# Altium PCB UC-523.PcbDoc (part 2 of 2)
Units mil, origin at the board's own origin, x right, y up, seen from the top; angles counter-clockwise.
Board outline 3149.61 x 3149.61 mil, 2 copper layers (Top Layer, Bottom Layer); 795 components, 348 nets, 3091 pads, 29 vias.
Unrouted connection lines stored in the file: 1727.
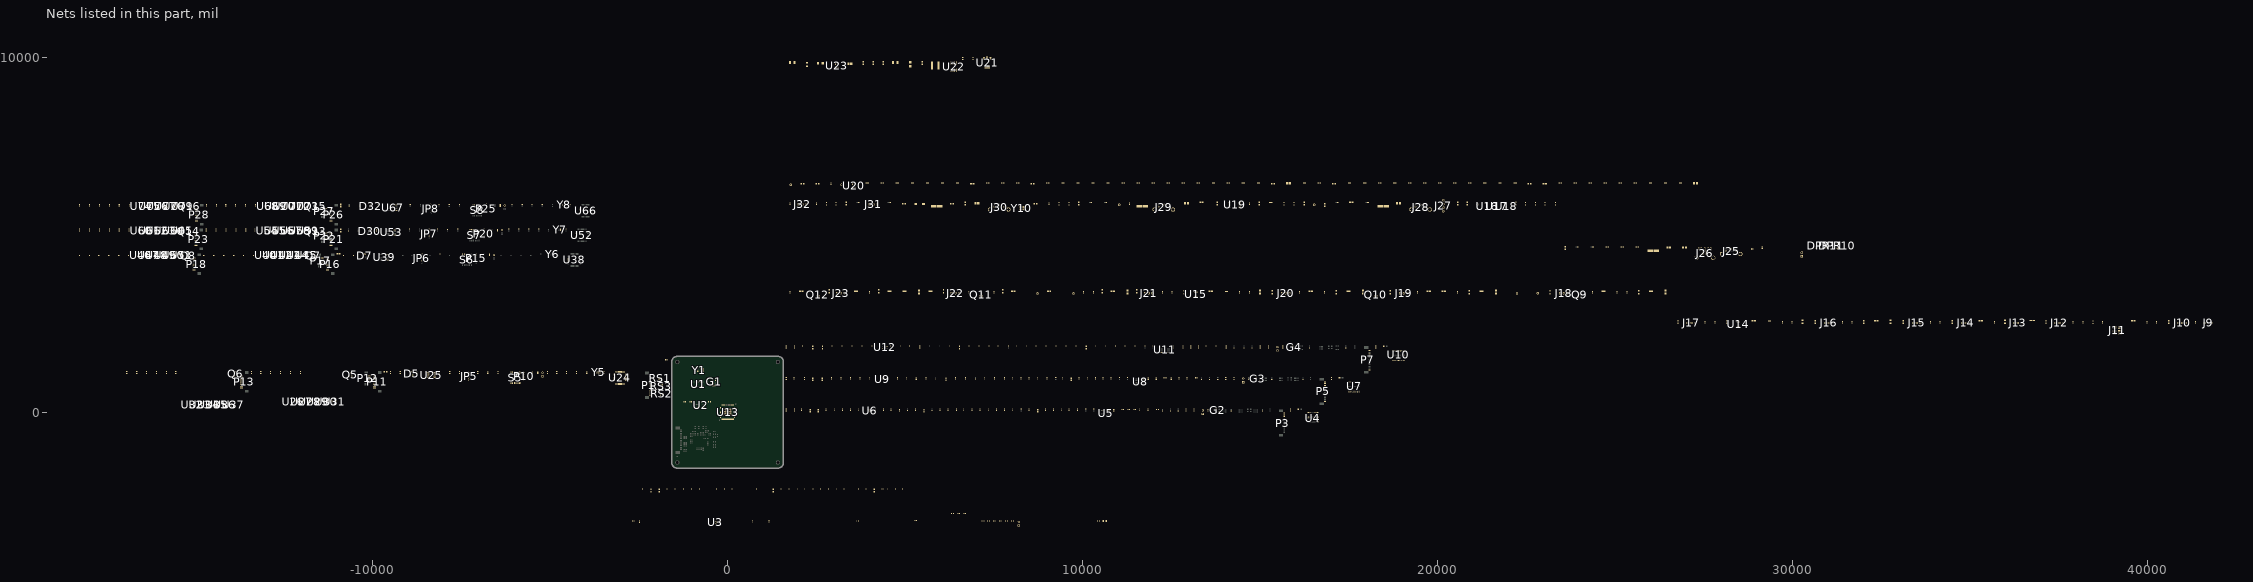
[diagram p2: the nets of this part, all layers, seen from the top]

## Footprints (in the part's own frame and the unit in brackets; to place one, negate y for a bottom-side part, rotate by r counter-clockwise, add the part's x,y. Pads: shape width x height; smd on the part's side, far side on the other; paste and mask are expansions set on the pad) (continued)
OSCCC250X320X70-4M [mm]
  rect 1.5x1.6 smd mask+0: 1(-0.95,1.25) 2(-0.95,-1.25) 3(0.95,-1.25) 4(0.95,1.25)
  Top Layer region: 0.175,1.65 0.175,0.375 1.3,0.375 1.3,-0.375 0.125,-0.375 0.125,-1.65 -0.175,-1.65 -0.175,-0.375 -1.3,-0.375 -1.3,0.375 -0.175,0.375 -0.175,1.65
  silkscreen extent -1.92,-1.65 1.92,1.65, body extent -1.32,-1.67 1.32,1.67, height 0.7
QFN40P1000X1000X100-89M [mm] "QFN, 88-Leads, Body 10.1x10.1mm (max), Pitch 0.40mm, IPC Low Density"
  oval 0.8x0.2 smd mask+0: 1(-5.05,4.2) 2(-5.05,3.8) 3(-5.05,3.4) 4(-5.05,3) 5(-5.05,2.6) 6(-5.05,2.2) 7(-5.05,1.8) 8(-5.05,1.4) 9(-5.05,1) 10(-5.05,0.6) 11(-5.05,0.2) 12(-5.05,-0.2) 13(-5.05,-0.6) 14(-5.05,-1) 15(-5.05,-1.4) 16(-5.05,-1.8) 17(-5.05,-2.2) 18(-5.05,-2.6) 19(-5.05,-3) 20(-5.05,-3.4) 21(-5.05,-3.8) 22(-5.05,-4.2) 45(5.05,-4.2) 46(5.05,-3.8) 47(5.05,-3.4) 48(5.05,-3) 49(5.05,-2.6) 50(5.05,-2.2) 51(5.05,-1.8) 52(5.05,-1.4) 53(5.05,-1) 54(5.05,-0.6) 55(5.05,-0.2) 56(5.05,0.2) 57(5.05,0.6) 58(5.05,1) 59(5.05,1.4) 60(5.05,1.8) 61(5.05,2.2) 62(5.05,2.6) 63(5.05,3) 64(5.05,3.4) 65(5.05,3.8) 66(5.05,4.2)
  oval 0.2x0.8 smd mask+0: 23(-4.2,-5.05) 24(-3.8,-5.05) 25(-3.4,-5.05) 26(-3,-5.05) 27(-2.6,-5.05) 28(-2.2,-5.05) 29(-1.8,-5.05) 30(-1.4,-5.05) 31(-1,-5.05) 32(-0.6,-5.05) 33(-0.2,-5.05) 34(0.2,-5.05) 35(0.6,-5.05) 36(1,-5.05) 37(1.4,-5.05) 38(1.8,-5.05) 39(2.2,-5.05) 40(2.6,-5.05) 41(3,-5.05) 42(3.4,-5.05) 43(3.8,-5.05) 44(4.2,-5.05) 67(4.2,5.05) 68(3.8,5.05) 69(3.4,5.05) 70(3,5.05) 71(2.6,5.05) 72(2.2,5.05) 73(1.8,5.05) 74(1.4,5.05) 75(1,5.05) 76(0.6,5.05) 77(0.2,5.05) 78(-0.2,5.05) 79(-0.6,5.05) 80(-1,5.05) 81(-1.4,5.05) 82(-1.8,5.05) 83(-2.2,5.05) 84(-2.6,5.05) 85(-3,5.05) 86(-3.4,5.05) 87(-3.8,5.05) 88(-4.2,5.05)
  rect 5.5x5.5 smd mask+0: 89(0,0)
  round 1 smd mask+0.5: ""(-5.81,-5.81) ""(5.81,5.81)
  silkscreen extent -6.45,-5.1 5.1,5.1, body extent -5.05,-5.05 5.05,5.05, height 1
R0603 [mm]
  rect 0.7x0.9 smd: 1(0.65,0) 2(-0.65,0)
  silkscreen extent -1.12,-0.64 1.12,0.64
RC0603_3P [mm]
  rect 1.1x1 smd mask+0.079: 1(-1.7,0) 2(0,0) 3(1.7,0)
  silkscreen extent -3.37,-1 2.5,1, body extent -2.5,-1 2.5,1, height 0
RESC1005X40M [mm]
  rect 0.68x0.72 smd mask+0: 1(-0.52,0) 2(0.52,0)
  silkscreen extent -0.53,-0.59 0.53,0.59, body extent -0.55,-0.3 0.55,0.3, height 0.4
RESC1608X50M [mm] "Chip Resistor, 2-Leads, Body 1.5x0.8mm, IPC Low Density"
  rect 1.4x1.05 smd mask+0: 1(-0.8,0) 2(0.8,0)
  silkscreen extent -0.85,-0.75 0.85,0.75, body extent -0.85,-0.45 0.85,0.45, height 0.5
RESC1608X55M [mm]
  rect 1.1x1.1 smd mask+0: 1(-0.9,0) 2(0.9,0)
  Top Layer keep-out region: -0.3,-0.475 0.3,-0.475 0.3,0.475 -0.3,0.475
  silkscreen extent -0.87,-0.77 0.87,0.77, body extent -0.87,-0.47 0.87,0.47, height 0.55
RESC1608X55M_A [mm]
  rect 1.2x1.1 smd mask+0: 1(-0.9,0) 2(0.9,0)
  Top Layer keep-out region: -0.25,-0.475 0.25,-0.475 0.25,0.475 -0.25,0.475
  silkscreen extent -0.85,-0.77 0.85,0.77, body extent -0.85,-0.48 0.85,0.47, height 0.55
RESC2012X65M [mm]
  rect 1.3x1.45 smd mask+0: 1(-1.05,0) 2(1.05,0)
  Top Layer keep-out region: -0.375,-0.675 0.375,-0.675 0.375,0.675 -0.375,0.675
  silkscreen extent -1.05,-0.95 1.05,0.95, body extent -1.05,-0.67 1.05,0.67, height 0.65
RESONATOR-SMD [mm]
  rect 0.7x1.7 smd: 1(-1.2,0) 2(0,0) 3(1.2,0)
  silkscreen extent -1.8,-0.65 1.8,0.65
SAMTEC_FTSH-105-01-L-DV-K [mm]
  rect 0.74x2.79 smd mask+0: 1(0,0) 2(0,4.07) 3(1.27,0) 4(1.27,4.07) 5(2.54,0) 6(2.54,4.07) 7(3.81,0) 8(3.81,4.07) 9(5.08,0) 10(5.08,4.07)
  silkscreen extent -0.67,-1.83 5.75,3.75, body extent -0.67,0.32 5.75,3.75, height 5.71
SAMTEC_TSW-102-08-G-S [mm]
  rect 1.72x1.72 / inner round 1.72 / far side rect 1.72x1.72 hole 1.02 mask+0: 1(0,0)
  round 1.72 hole 1.02 mask+0: 2(2.54,0)
  silkscreen extent -1.27,-1.27 3.81,1.27, body extent -1.3,-1.3 3.84,1.3, height 8.38
SAMTEC_TSW-104-08-G-S [mil]
  rect 67.72x67.72 hole 40.16 mask+0: 1(150,0)
  round 67.72 hole 40.16 mask+0: 2(50,0) 3(-50,0) 4(-150,0)
  silkscreen extent -200,-50 233,50, body extent -201,-51 201,51, height 330
SH_1.25MM*8 [mm]
  rect 0.7x2 smd: 1(-4.375,3.75) 2(-3.125,3.75) 3(-1.875,3.75) 4(-0.625,3.75) 5(0.625,3.75) 6(1.875,3.75) 7(3.125,3.75) 8(4.375,3.75)
  rect 1.9x2.4 smd: 9(-6.731,0) 9(6.731,0)
  silkscreen extent -7.87,-1.27 7.87,3.81
SMT_1.25MM*4 [mm]
  rect 0.7x2.3 smd: 1(1.875,-1.025) 2(0.625,-1.025) 3(-0.625,-1.025) 4(-1.875,-1.025)
  rect 1.9x2.4 smd: 7(-4.1,1) 7(4.1,1)
  silkscreen extent -5.28,-2.16 5.25,2.42
SOD2513X120M [mm] "SOIC, 2-Leads, Body 1.4x1.8mm (max), Pitch 1.27mm, IPC Low Density"
  rect 1.65x0.55 smd mask+0: 1(-1.1,0) 2(1.1,0)
  silkscreen extent -0.9,-0.7 0.9,0.7, body extent -0.9,-0.7 0.9,0.7, height 1.2
SOIC127P600X175-8M [mm] "SOIC, 8-Leads, Body 5.0x4.0mm (max), Pitch 1.27mm, IPC Low Density"
  rect 2.5x0.7 smd mask+0: 1(-2.45,1.905) 2(-2.45,0.635) 3(-2.45,-0.635) 4(-2.45,-1.905) 5(2.45,-1.905) 6(2.45,-0.635) 7(2.45,0.635) 8(2.45,1.905)
  silkscreen extent -4.64,-2.5 2,2.53, body extent -2,-2.5 2,2.5, height 1.75
SOIC127P600X175-8N [mm] "SOIC, 8-Leads, Body 4.9x3.9mm (max), Pitch 1.27mm, IPC Medium Density"
  rect 2.1x0.6 smd: 1(-2.425,1.905) 2(-2.425,0.635) 3(-2.425,-0.635) 4(-2.425,-1.905) 5(2.425,-1.905) 6(2.425,-0.635) 7(2.425,0.635) 8(2.425,1.905)
  silkscreen extent -3.5,-2.45 0.98,3.25, body extent -1.95,-2.45 1.95,2.45, height 1.75
SOIC127P790X203-8M [mm] "SOIC, 8-Leads, Body 5.3x5.3mm (max), Pitch 1.27mm, IPC Low Density"
  oval 1.8x0.7 smd mask+0: 1(-3.675,1.905) 2(-3.675,0.635) 3(-3.675,-0.635) 4(-3.675,-1.905) 5(3.675,-1.905) 6(3.675,-0.635) 7(3.675,0.635) 8(3.675,1.905)
  silkscreen extent -5.58,-2.65 2.38,2.63, body extent -2.62,-2.63 2.63,2.63, height 2.03
SOIC-8 [mm]
  oval 2.2x0.6 smd: 1(-2.4,1.905) 2(-2.4,0.635) 3(-2.4,-0.635) 4(-2.4,-1.905) 5(2.4,-1.905) 6(2.4,-0.635) 7(2.4,0.635) 8(2.4,1.905)
  silkscreen extent -2.52,-2.5 0.9,2.88, body extent -2,-2.5 2,2.5, height 1.75
SON50P300X300X100-11M [mm]
  oval 0.9x0.3 smd mask+0: 1(-1.55,1) 2(-1.55,0.5) 3(-1.55,0) 4(-1.55,-0.5) 5(-1.55,-1) 6(1.55,-1) 7(1.55,-0.5) 8(1.55,0) 9(1.55,0.5) 10(1.55,1) 11(0,0)
  round 0.6 hole 0.3 mask+0: 12(0,0) 13(-0.5,0.75) 14(0.5,0.75) 15(-0.5,-0.75) 16(0.5,-0.75)
  Top Layer region: 0.825,-1.2 0.825,1.2 0.39,1.2 0.39,1.9 0.11,1.9 0.11,1.2 -0.11,1.2 -0.11,1.9 -0.39,1.9 -0.39,1.2 -0.825,1.2 -0.825,-1.2 -0.39,-1.2 -0.39,-1.9 -0.11,-1.9 -0.11,-1.2 0.11,-1.2 0.11,-1.9 0.39,-1.9 0.39,-1.2 0.825,-1.2
  silkscreen extent -2.49,-1.55 1.55,1.55, body extent -1.55,-1.55 1.55,1.55, height 1
SOP95P275X110-5M [mm] "SOT23, 5-Leads, Body 3.0x3.0mm (max), Pitch 0.95mm, IPC Low Density"
  rect 1.3x0.7 smd mask+0: 1(-1.15,0.95) 2(-1.15,0) 3(-1.15,-0.95) 4(1.15,-0.95) 5(1.15,0.95)
  silkscreen extent -2.77,-1.53 0.75,1.53, body extent -0.75,-1.5 0.75,1.5, height 1.1
SOT23-3 [mil]
  rect 40x50 smd: 1(40,-50) 2(-40,-50) 3(0,50)
  silkscreen extent -50,-10 50,50, body extent -59,-52 59,46, height 42
SOT26 [mm]
  rect 1.2x0.55 smd: 1(-1.25,0.95) 2(-1.25,0) 3(-1.25,-0.95) 4(1.25,-0.95) 5(1.25,0) 6(1.25,0.95)
  silkscreen extent -2.17,-1.4 0.45,1.62
SOT92P240X110-3M [mm] "SOT23, 3-Leads, Body 3.0x2.5mm (max), Pitch 0.92mm, IPC Low Density"
  rect 1.75x0.6 smd mask+0: 1(-0.975,0.915) 2(-0.975,-0.915) 3(0.975,0)
  silkscreen extent -2.97,-1.5 0.7,1.5, body extent -0.7,-1.5 0.7,1.5, height 1.1
SOT95P280X145-5M [mm] "SOT23, 5-Leads, Body 3.1x2.8mm (max), Pitch 0.95mm, IPC Low Density"
  rect 1.2x0.7 smd mask+0: 1(-1.2,0.95) 2(-1.2,0) 3(-1.2,-0.95) 4(1.2,-0.95) 5(1.2,0.95)
  silkscreen extent -2.74,-1.55 0.87,1.55, body extent -0.87,-1.55 0.87,1.55, height 1.45
"SOT-23 (Standard)" [mil]
  rect 40x50 smd: D(40,100) G(0,0) S(80,0)
  silkscreen extent -10,40 90,100, body extent -19,-2 99,96, height 42
SOT-223 [mm] "TSOP, 44-Leads, Body 18.4x10.2mm (max), Pitch 0.80mm, IPC Mediu"
  rect 1.5x2 smd: 1(2.3,6.275) 2(0,6.3) 3(-2.3,6.275)
  rect 4x2 smd: 2(0,0)
  silkscreen extent -3.32,1.48 3.32,4.75, body extent -3.2,-0.36 3.3,6.54, height 1.72
SOTFL35P100X50-3M [mm]
  rect 0.58x0.2 smd mask+0: 1(-0.57,0.35) 2(-0.57,-0.35) 3(0.57,0)
  silkscreen extent -1.7,-0.65 0.43,0.7, body extent -0.45,-0.55 0.45,0.55, height 0.5
SW_EVQ-5PN04K [mm]
  rect 2x1.6 smd mask+0: 1(-2.7,0) 2(2.7,0)
  Top Layer region: -2.9,2 -2.9,0.9 -1.6,0.9 -1.6,-0.9 -2.9,-0.9 -2.9,-2 2.9,-2 2.9,-0.9 1.6,-0.9 1.6,0.9 2.9,0.9 2.9,2
  silkscreen extent -3,-2 3,2, body extent -3,-2 3,2, height 4.3
TE_3-644456-3 [mil]
  rect 68x68 / inner round 68 / far side rect 68x68 hole 40 mask+0: 1(0,0)
  round 68 hole 40 mask+0: 2(100,0) 3(200,0)
  silkscreen extent -94,-46 244,46, body extent -45,-47 245,47, height 405
TP25C50 [mil]
  round 20 hole 10 mask+0: 1(0,0)
  silkscreen extent -15,-15 15,15
TQFP32-08 [mil]
  rect 50x22 smd: 1(-169,110.24) 2(-169,78.74) 3(-169,47.25) 4(-169,15.75) 5(-169,-15.74) 6(-169,-47.24) 7(-169,-78.74) 8(-169,-110.24) 17(169.01,-110.23) 18(169,-78.73) 19(169,-47.24) 20(169,-15.74) 21(169,15.75) 22(169,47.25) 23(169,78.74) 24(169,110.24)
  rect 22x50 smd: 9(-110.24,-169) 10(-78.74,-169) 11(-47.24,-168.99) 12(-15.74,-169) 13(15.75,-169) 14(47.25,-169) 15(78.74,-169) 16(110.24,-169) 25(110.24,169) 26(78.74,169) 27(47.25,169) 28(15.75,169) 29(-15.75,169) 30(-47.24,169) 31(-78.73,169) 32(-110.23,169)
  silkscreen extent -138,-138 138,138
UDFN [mm] "QFN, 8-Leads, Body 2.1x3.1mm (max), Pitch 0.50mm, IPC Medium Density"
  rect 0.6x0.3 smd: 1(-1.5,0.75) 2(-1.5,0.25) 3(-1.5,-0.25) 4(-1.5,-0.75) 5(1.5,-0.75) 6(1.5,-0.25) 7(1.5,0.25) 8(1.5,0.75)
  rect 1.4x1.6 smd: 4(0,0)
  silkscreen extent -2.52,-1.55 1.55,1.55, body extent -1.5,-1 1.52,1, height 0.6
爱普生晶振3.2×2.5mm [mm]
  rect 1.05x0.85 smd: 1(-1.1,-0.8) 2(1.1,-0.8) 3(1.1,0.8) 4(-1.1,0.8)
  Top Layer pour cut-out: -1.778,1.372 -1.778,-1.372 1.778,-1.372 1.778,1.372
  silkscreen extent -1.78,-2.03 1.78,1.37
爱普生晶振3.2×2.5MM [mm]
  rect 1.05x0.85 smd: 1(-1.1,-0.8) 2(1.1,-0.8) 3(1.1,0.8) 4(-1.1,0.8)
  Top Layer pour cut-out: -1.778,1.372 -1.778,-1.372 1.778,-1.372 1.778,1.372
  silkscreen extent -1.78,-2.03 1.78,1.37
"爱普生晶振3.2×2.5MM - 无源" [mm]
  rect 1.05x0.85 smd: 1(-1.1,-0.8) 2(1.1,0.8) 3(1.1,-0.8) 4(-1.1,0.8)
  Top Layer pour cut-out: -1.778,1.372 -1.778,-1.372 1.778,-1.372 1.778,1.372
  silkscreen extent -1.78,-2.03 1.78,1.37

## Part data
C1 C1_1 C2 C2_1 C41 C42 C81 C82 C121 C122: library part "CAP CER SMT 4.3pF 0805", "CAP CER SMT 4.3pF 0805"
C3 C3_1 C29 C43 C69 C83 C109 C123 C149: library part CAP, "RC=1206"
C4 C44 C84 C124 C249: library part Cap, "50V/8.2u/0805"
C5 C6 C8 C9 C9_1 C10 C10_1 C11 C12 C13 C14 C15 C15_1 C16 C16_1 C17 C17_1 C18 C18_1 C19 C19_1 C20 C20_1 C21 C21_1 C22 C22_1 C23 C23_1 C24 C24_1 C25 C25_1 C26 C26_1 C27 C27_1 C28 C28_1 C29_1 C30 C30_1 C31 C31_1 C32 C32_1 C33 C34 C35 C36 C36_1 C37 C37_1 C38 C38_1 C39 C39_1 C40 C40_1 C41_1 C42_1 C43_1 C44_1 C45 C45_1 C46 C46_1 C47_1 C48 C49 C50 C51 C52 C53 C54 C55 C56 C57 C58 C59 C60 C61 C62 C63 C64 C65 C66 C67 C68 C70 C71 C72 C73 C74 C75 C76 C77 C78 C79 C80 C85 C86 C88 C89 C90 C91 C92 C93 C94 C95 C96 C97 C98 C99 C100 C101 C102 C103 C104 C105 C106 C107 C108 C110 C111 C112 C113 C114 C115 C116 C117 C118 C119 C120 C125 C126 C128 C129 C130 C131 C132 C133 C134 C135 C136 C137 C138 C139 C140 C141 C142 C143 C144 C145 C146 C147 C148 C150 C151 C152 C153 C154 C155 C156 C157 C158 C159 C160 C250: library part CAP0805, "Capacitor"
C7 C47 C87 C127: library part "CAP SMT 0.1uF 16V X7R", "CAP SMT 0.1uF 16V X7R"
C161: library part "0.1 uFd 0402", "CAP .1UF 16V CERAMIC Y5V 0402"
C162 C163 C164 C166 C167 C168 C169 C170 C171 C172 C173 C175 C176 C177 C178 C179 C181 C182 C183 C184 C185 C186 C189 C190 C191 C192 C193 C194 C195 C196 C197 C198 C199 C200 C201 C202 C203 C204 C205 C206 C207 C208 C209 C210 C211 C212 C213 C214 C215 C216 C217 C218 C219 C220 C221 C222 C223 C224 C225 C226 C227 C228 C229 C230 C231 C232 C233 C234 C235 C236 C237 C238 C239 C240 C241 C242 C243 C244 C245 C246 C252 C254 C255: library part "CAPACITOR NON-POL"
C165 C174 C180 C187: library part "CAP POL", "CAP ALUM 150UF 16V 20% SMD"
C188: library part "CAPACITOR NON-POL", "CAP CER 1.5UF 10V 10% X7R 0805"
C247 C248: library part CAP, "CAP - CER, 1uF, 10V, +/-10%, X5R, 0402"
C251: library part "CAP POL", "CAP TANT 22UF 16V 10% 1206"
C253: library part "CAPACITOR NON-POL", "CAP CER 2200PF 50V 10% X7R 0805"
C256 C257 C258 C260 C261 C262 C264 C265 C266 C268 C269 C270: library part "CAP SMT C100nF25V10%X7R", "Capacitor"
C259 C263 C267 C271: library part Cap, "Capacitor"
D6 D8 D31 D33 V1 V2 V3 V4: library part LED0, "Typical INFRARED GaAs LED"
D9 D10 D11 D12 D13 D14 D15 D16 D17 D18 D19 D20 D21 D22 D23 D24 D25 D26 D27 D28 D29 SUSP10: library part LED
DPR10 DPR11: library part DPR12_0, "Resistor, 4.7K, 0402, 1/10W, 5%"
G1 G1_1 G2 G3 G4: library part CTY4-B
J9 J10 J12 J13 J14 J15 J16 J17 J18 J19 J20 J21 J22 J23 J31 J32: library part "3PIN JUM", "CONN HEADER VERT 3POS .100 TIN"
J11: library part "10 Pin Header 50mil Keyed SMD", "CONN HEADER 10 PIN 50MIL KEYED SMD"
J24: library part HEADER_1x2
J25 J28 J30: library part UEA1112C_TX, "9 Position Right Angle 3.0 USB Connector"
J26: library part UEB1112C-2AK1-4H, "USB 3.0 B Series Right Angle,T/H 9 Pos"
J27: library part "HEADER 4", "CONN HEADER 4POS .100\" SNGL GOLD"
J29: "9 Position Right Angle 3.0 USB Connector"
JP5 JP6 JP7 JP8: "Header, 3-Pin, Dual row"
K5 K6 K7 K8: "Switch"
L1 L1_1 L2 L3 L3_1 L4 L4_1 L5 L5_1 L6 L7 L8 L9 L10 L11 L12 L13 L14 L15 L16: library part Inductor, "Inductor"
L17 L18 L19 L20 L21 L22 L23: library part INDUCTOR, "FERRITE CHIP 220 OHM 2A 0805"
L24: library part INDUCTOR, "INDUCTOR 4.7UH 2.7A 20% SMD"
L25: library part INDUCTOR, "INDUCTOR 2.2UH 1.20A 20% 1210"
P1 P3 P3_1 P5 P7: library part "Header 30", "Header, 30-Pin"
P2 P4 P6 P8 P9 P14 P19 P24: "Header, 2-Pin"
P10 P15 P20 P25: library part ARDUINO_SERIAL_PROGRAMPTH
P11 P13 P16 P18 P21 P23 P26 P28: "Header, 8-Pin"
P12 P17 P22 P27: "Header, 4-Pin"
Q5 Q6 Q7 Q8 Q13 Q14 Q15 Q16: library part NMOS
Q9 Q10 Q11 Q12: "MOSFET N-CH 50V 500MA SOT23"
R1 R2 R3 R4 R5 R6 R7 R8 R9 R10 R11 R11_1 R12 R13 R14 R15 R16 R17 R18 R19 R20 R21 R22 R23 R24 R25 R26 R27 R28 R29 R30 R31 R32 R33 R34 R35 R36 R37 R38 R39 R40 R41 R42 R43 R44 R130 R131 R132 R133 R134 R135 R136 R137 R138 R139 R140 R141 R142 R143 R144 R145 R146 R147 R148 R149 R150 R151 R152 R153 R154 R155 R156 R157 R158 R159 R160 R161 R162 R163 R164 R165 R166 R167 R168 R169 R170 R171 R172 R173 R174 R175 R176 R177 R178 R179 R180 R181 R182 R183 R184 R185 R186 R187 R188 R189 R190 R191 R192 R193 R194 R195 R196 R197 R198 R199 R200 R201 R202 R203 R204 R205 R206 R207 R208 R209 R210 R211 R212 R213 R214 R215 R216 R217 R218 R219 R220 R221: library part Res2, "Resistor"
R45 R46 R47 R49 R50 R51 R53 R55 R56 R59 R60 R62 R63 R65 R66 R70 R72 R75 R78 R81 R83 R85 R86 R88 R89 R92 R96 R97 R102 R105 R115 R116 R118 R126: library part R_Dup1, "RES 10.0K OHM 1/10W 1% 0603 SMD"
R48 R52 R54 R57 R58 R61 R64 R67 R68 R71 R73 R74 R76 R77 R79 R80 R82 R84 R87 R90 R91 R94 R95 R98 R99 R100 R101 R103 R104 R106 R107 R117 R120 R121 R123 R124: library part R_Dup1
R69 R93: library part R_Dup1, "RES 28.0K OHM 1/10W 1% 0402 SMD"
R108 R109 R114 R119 R122: library part R, "RES 1M OHM 1/10W 1% 0603 SMD"
R110 R111: library part R_Dup1, "RES 2.00K OHM 1/10W 1% 0603 SMD"
R112: library part R_Dup1, "RES 200 OHM 1% 0603 SMD"
R113: library part R_Dup1, "RES 6.04K OHM .25W 1% 0603 SMD"
R125: library part R, "RES 1.00M OHM 1/10W 1% 0402 SMD"
R127 R129: library part R_Dup1, "RES 7.5K OHM 1/10W 1% 0603 SMD"
R128: library part R_Dup1, "RES 2.4K OHM 1/10W 1% 0603 SMD"
RS1 RS1_1 RS2 RS2_1 RS3 RS3_1 RS4 RS5 RS6 RS7 RS8 RS9 RS10 RS11 RS12: library part RN4
S5 S6 S7 S8: "DIP Switch, 6 Position, SPST"
SW10: library part B3U1000P
TP9 TP11 TP13 TP16 TP17 TP18 TP19 TP20 TP21 TP22: library part TP, "TEST POINT PC MINI .040\"D RED"
TP10 TP12 TP14 TP15: library part TP
TVS9: library part "TVS 5V SOD-323_0", "TVS UNIDIR 350W 5V SOD-323"
U2 U5 U8 U11: library part 24LC64-I/SN, "IC EEPROM 64KBIT 400KHZ 8SOIC"
U3 U6 U9 U12: library part AT24C128
U13: library part CYUSB3314-88LTXC_2
U19: library part 24LC128, "IC EEPROM 128KBIT 400KHZ 8SOIC"
U20: library part NCP361SNT1G_0, "IC USB POS OVP/OC_TSOP5"
U21: library part AMS1117
U22: "IC REG BUCK SYNC ADJ 3A 8SOIC"
U23: "IC REG BUCK SYNC 1.2V SOT23-5"
U24 U38 U52 U66: library part ATMEGA168
U25 U39 U53 U67: library part MAX3485CSA
Y1 Y1_1 Y2 Y3 Y4: library part "XTAL 32.768KHZ", "Crystal, CRYSTAL 32.768KHZ 6PF SMD"
Y5 Y6 Y7 Y8: library part RESONATORSMD
Y10: library part CRYSTAL_1

## Free pads (board coordinates)
  round 118.11 hole 78.74: 0(-1417.32,-1417.32) 0(-1417.32,1417.32) 0(1417.32,-1417.32) 0(1417.32,1417.32)

## Via types
v1: diameter 25.98, hole 12.99, Top Layer to Bottom Layer, 25 vias
v2: diameter 24, hole 12, Top Layer to Bottom Layer, 4 vias

## Nets (pads, with @x,y where several pads share a name; then routed paths per layer and width w, separated by ;. In a path a pad name is that pad's centre, name@x,y a point inside that pad or via, vN(x,y) a via of type N, cw(c..) or ccw(c..) an arc to the next point about the centre after c; other vN are vias at no path point)
A0: U24.23
A1: U24.24
A2: U24.25
A3: U24.26
A4: U24.27
A5: U24.28
A6: U24.19
A7: U24.22
AD1: R131.2 S5.1 U24.2
AD2: R132.2 S5.2 U24.9
AD3: R133.2 S5.3 U24.10
AD4: R134.2 S5.4 U24.11
AREF: C257.2 U24.20
AVDD: C13.2 C14.1 C53.2 C54.1 C93.2 C94.1 C133.2 C134.1 L2.2 L6.2 L10.2 L14.2 U1.A7 U4.A7 U7.A7 U10.A7
CLK_OUT: G1.3 U1.D6
D0_IO: P1.18
D1_IO: P1.17
D2: P11.5 P13.5 S5.8 U24.32
D2_IO: P1.16
D3: P11.6 P13.6 S5.7 U24.1
D3_IO: P1.15
D4_IO: P1.14 RS3.7
D5_IO: P1.12 RS3.8
D6_IO: P1.11 RS2.5
D7_IO: P1.10 RS2.6
D8: R140.1 U24.12 U25.2 U25.3
D8_IO: P1.9 RS2.7
D9: Q5.G U24.13
D9_IO: P1.8 RS2.8
D10: Q6.G U24.14
D10_IO: P1.7 RS1.5
D11_IO: P1.6 RS1.6
DS1_AMB: D9.1 R45.2 U13.2
DS1_PWREN: R47.1 R77.1 TP12.1 U13.38 U14.4
DS1_TXM: C168.2 U13.58
DS1_TXP: C169.2 U13.57
DS2_PWREN: R49.1 R82.1 TP9.1 U13.86 U14.5
DS2_TXM: C175.2 U13.52
DS2_TXP: C176.2 U13.51
DS3_PWREN: R51.1 R99.1 TP13.1 U13.87 U15.4
DS3_TXM: C181.2 U13.49
DS3_TXP: C182.2 U13.48
DS4_LED_SS: D29.1 J23.3 R105.2
DS4_PWREN: R53.1 R103.1 TP14.1 U13.35 U15.5
DS4_TXM: C189.2 U13.17
DS4_TXP: C190.2 U13.16
DTR: C256.1 P10.1
DVDD12: C193.2 C194.2 C195.2 C196.2 C197.2 C198.2 C199.2 C200.2 C201.2 C202.2 L22.2 U13.8 U13.24 U13.33 U13.83
FRV_IO: P1.4 RS1.8
FX3_CTL0: P1.23 U1.K8
FX3_CTL1: R2.2 U1.K7
FX3_CTL2: P1.26 U1.J7
FX3_CTL3: U1.H7
FX3_CTL4_SW: U1.G7
FX3_CTL5: U1.G6
FX3_CTL6: U1.K6
FX3_CTL7: U1.H8
FX3_CTL8: U1.G5 V1.2
FX3_CTL11: RS1.2 U1.J5
FX3_CTL12: RS1.1 U1.H5
FX3_CTL15: R5.2 U1.L8
FX3_DQ0: RS3.2 U1.F10
FX3_DQ1: RS3.1 U1.F9
FX3_DQ2: RS2.4 U1.F7
FX3_DQ3: RS2.3 U1.G10
FX3_DQ4: RS2.2 U1.G9
FX3_DQ5: RS2.1 U1.F8
FX3_DQ6: RS1.4 U1.H10
FX3_DQ7: RS1.3 U1.H9
FX3_DQ8: U1.J10
FX3_DQ9: U1.J9
FX3_DQ10: U1.K11
FX3_DQ11: U1.L10
FX3_DQ12: U1.K10
FX3_DQ13: U1.K9
FX3_DQ14: U1.J8
FX3_DQ15: U1.G8
FX3_I2S_SCL: P1.21 R8.1 U1.D9 U2.6 U3.6
FX3_I2S_SDA: P1.22 R7.1 U1.D10 U2.5 U3.5
FX3_PCLK: RS3.4 U1.J6
FX3_RESET: C4.2 R6.2 U1.C5
FX3_SPI-MISO_UART-TX: U1.C2
FX3_SPI-MOSI_UART-RX: U1.D5
FX3_SPI-SCK_UART-RTS: U1.D4
FX3_SPI-SSN_UART-CTS: U1.C1
GND: C1.1 C2.1 C3.2 C4.1 C5.2 C6.2 C7.1 C8.2 C9.2 C10.2 C11.2 C12.2 C13.1 C14.2 C15.2 C16.2 C17.2 C18.2 C19.2 C20.2 C21.2 C22.2 C23.2 C24.2 C26.1 C27.2 C29.2 C30.2 C31.2 C32.2 C33.2 C34.2 C35.2 C36.2 C37.2 C38.1 C39.1 C40.2 C41.1 C42.1 C43.2 C44.1 C45.2 C46.2 C47.1 C48.2 C49.2 C50.2 C51.2 C52.2 C53.1 C54.2 C55.2 C56.2 C57.2 C58.2 C59.2 C60.2 C61.2 C62.2 C64.2 C65.2 C66.1 C68.2 C69.2 C70.2 C71.2 C72.2 C73.2 C74.2 C75.2 C76.2 C77.2 C78.1 C79.1 C80.2 C81.1 C82.1 C83.2 C84.1 C85.2 C86.2 C87.1 C88.2 C89.2 C90.2 C91.2 C92.2 C93.1 C94.2 C95.2 C96.2 C97.2 C98.2 C99.2 C100.2 C102.2 C103.2 C104.2 C105.2 C107.1 C108.2 C109.2 C110.2 C111.2 C112.2 C113.2 C114.2 C115.2 C116.2 C117.2 C118.1 C119.1 C120.2 C121.1 C122.1 C123.2 C124.1 C125.2 C126.2 C127.1 C128.2 C129.2 C130.2 C131.2 C132.2 C133.1 C134.2 C135.2 C136.2 C137.2 C138.2 C139.2 C140.2 C141.2 C142.2 C143.2 C144.2 C145.1 C147.2 C149.2 C150.2 C151.2 C152.2 C153.2 C154.2 C155.2 C156.2 C157.2 C158.1 C159.1 C160.2 C161.2 C162.2 C163.2 C164.1 C165.2 C170.2 C171.2 C172.2 C173.2 C174.2 C177.2 C178.2 C179.1 C180.2 C183.2 C184.2 C185.1 C186.1 C187.2 C188.2 C191.2 C192.2 C193.1 C194.1 C195.1 C196.1 C197.1 C198.1 C199.1 C200.1 C201.1 C202.1 C203.1 C204.1 C205.1 C206.1 C207.1 C208.1 C209.1 C210.1 C211.1 C212.1 C213.1 C214.1 C215.1 C216.1 C217.1 C218.1 C219.1 C220.1 C221.1 C222.1 C223.1 C224.1 C225.1 C226.1 C227.1 C228.1 C229.1 C230.1 C231.1 C232.1 C233.1 C234.1 C235.1 C236.1 C237.1 C238.1 C239.1 C240.1 C241.1 C242.1 C243.1 C244.1 C245.1 C246.1 C247.2 C248.2 C249.1 C250.2 C251.2 C252.2 C253.1 C254.2 C255.2 C257.1 C258.2 C259.1 C261.1 C262.2 C263.1 C265.1 C266.2 C267.1 C269.1 C270.2 C271.1 D5.3 D6.2 D7.3 D8.2 D30.3 D31.2 D32.3 D33.2 DPR11.3 G1.2 G2.2 G3.2 G4.2 J9.3 J10.3 J11.3 J11.5 J11.7 J11.9 J13.3 J14.3 J25.4 J25.7 J26.4 J26.7 J27.4 J28.4 J28.7 J29.4 J29.7 J30.4 J30.7 J31.3 J32.3 JP5.6 JP6.6 JP7.6 JP8.6 K5.1 K6.1 K7.1 K8.1 P1.1 P1.13 P1.24 P1.25 P3.1 P3.13 P3.24 P3.25 P5.1 P5.13 P5.24 P5.25 P7.1 P7.13 P7.24 P7.25 P9.2 P10.5 P10.6 P11.1 P11.4 P11.7 P12.4 P13.1 P13.4 P13.7 P14.2 P15.5 P15.6 P16.1 P16.4 P16.7 P17.4 P18.1 P18.4 P18.7 P19.2 P20.5 P20.6 P21.1 P21.4 P21.7 P22.4 P23.1 P23.4 P23.7 P24.2 P25.5 P25.6 P26.1 P26.4 P26.7 P27.4 P28.1 P28.4 P28.7 Q5.S Q6.S Q7.S Q8.S Q9.2 Q10.2 Q11.2 Q12.2 Q13.S Q14.S Q15.S Q16.S R9.2 R10.2 R11.2 R20.2 R21.2 R22.2 R31.2 R32.2 R33.2 R42.2 R43.2 R44.2 R45.1 R48.2 R54.2 R55.1 R58.2 R59.1 R64.2 R65.1 R68.2 R69.1 R70.1 R74.2 R75.1 R80.2 R81.1 R87.2 R88.1 R91.2 R92.1 R93.1 R94.2 R96.1 R100.2 R102.1 R104.2 R105.1 R107.2 R108.2 R109.2 R112.2 R113.2 R114.2 R117.2 R119.2 R120.2 R122.2 R128.2 R135.1 R138.1 R141.2 R142.2 R143.2 R144.2 R145.2 R146.2 R147.2 R148.2 R149.2 R150.2 R151.2 R152.2 R158.1 R161.1 R164.2 R165.2 R166.2 R167.2 R168.2 R169.2 R170.2 R171.2 R172.2 R173.2 R174.2 R175.2 R181.1 R184.1 R187.2 R188.2 R189.2 R190.2 R191.2 R192.2 R193.2 R194.2 R195.2 R196.2 R197.2 R198.2 R204.1 R207.1 R210.2 R211.2 R212.2 R213.2 R214.2 R215.2 R216.2 R217.2 R218.2 R219.2 R220.2 R221.2 S5.9 S5.10 S5.11 S5.12 S6.9 S6.10 S6.11 S6.12 S7.9 S7.10 S7.11 S7.12 S8.9 S8.10 S8.11 S8.12 SW10.1 TVS9.2 U1.A1 U1.A8 U1.B2 U1.B4 U1.B7 U1.B8 U1.B9 U1.D8 U1.E2 U1.E6 U1.G1 U1.G11 U1.K3 U1.K4 U1.L1 U1.L2 U1.L3 U1.L6 U1.L11 U2.4 U3.4 U4.A1 U4.A8 U4.B2 U4.B4 U4.B7 U4.B8 U4.B9 U4.D8 U4.E2 U4.E6 U4.G1 U4.G11 U4.K3 U4.K4 U4.L1 U4.L2 U4.L3 U4.L6 U4.L11 U5.4 U6.4 U7.A1 U7.A8 U7.B2 U7.B4 U7.B7 U7.B8 U7.B9 U7.D8 U7.E2 U7.E6 U7.G1 U7.G11 U7.K3 U7.K4 U7.L1 U7.L2 U7.L3 U7.L6 U7.L11 U8.4 U9.4 U10.A1 U10.A8 U10.B2 U10.B4 U10.B7 U10.B8 U10.B9 U10.D8 U10.E2 U10.E6 U10.G1 U10.G11 U10.K3 U10.K4 U10.L1 U10.L2 U10.L3 U10.L6 U10.L11 U11.4 U12.4 U13.50 U13.89 U14.1 U14.11 U15.1 U15.11 U16.3 U17.3 U18.3 U19.2 U19.3 U19.4 U19.7 U20.2 U20.3 U21.1 U22.1 U22.3 U23.2 U24.3 U24.5 U24.21 U25.5 U26.4 U27.4 U28.4 U29.4 U30.4 U31.4 U32.4 U33.4 U34.4 U35.4 U36.4 U37.4 U38.3 U38.5 U38.21 U39.5 U40.4 U41.4 U42.4 U43.4 U44.4 U45.4 U46.4 U47.4 U48.4 U49.4 U50.4 U51.4 U52.3 U52.5 U52.21 U53.5 U54.4 U55.4 U56.4 U57.4 U58.4 U59.4 U60.4 U61.4 U62.4 U63.4 U64.4 U65.4 U66.3 U66.5 U66.21 U67.5 U68.4 U69.4 U70.4 U71.4 U72.4 U73.4 U74.4 U75.4 U76.4 U77.4 U78.4 U79.4 Y5.2 Y6.2 Y7.2 Y8.2 Y10.2 Y10.4
  other v1: -94.49,-94.49 -47.24,-94.49 0,-94.49 47.24,-94.49 94.49,-94.49 -94.49,-47.24 -47.24,-47.24 0,-47.24 47.24,-47.24 94.49,-47.24 -94.49,0 -47.24,0 0,0 47.24,0 94.49,0 -94.49,47.24 -47.24,47.24 0,47.24 47.24,47.24 94.49,47.24 -94.49,94.49 -47.24,94.49 0,94.49 47.24,94.49 94.49,94.49
  other v2: -345,-3100 4010,45 4360,935 4430,1825
I2C_DEV_ID: J20.2 U13.30
I2C_SCL: J27.3 R111.1 TP19.1 U13.40 U19.6
I2C_SDA: J27.2 R110.1 TP18.1 U13.41 U19.5
LIV_IO: P1.5 RS1.7
MISO: JP5.4 U24.16
MODE_SEL0: R123.1 U13.28
MODE_SEL1: R124.1 U13.29
MOSI: JP5.3 U24.15
NetC5_1: C5.1 C6.1 L1.1 U1.B6
NetC45_1: C45.1 C46.1 L5.1 U4.B6
NetC85_1: C85.1 C86.1 L9.1 U7.B6
NetC125_1: C125.1 C126.1 L13.1 U10.B6
NetC164_2: C164.2 J26.1 L18.2
NetC165_1: C165.1 J25.1 L17.2
NetC170_1: C170.1 C171.1 J26.10 J26.11 R108.1
NetC172_1: C172.1 C173.1 J25.10 J25.11 R109.1
NetC174_1: C174.1 J28.1 L19.2
NetC177_1: C177.1 C178.1 J28.10 J28.11 R114.1
NetC180_1: C180.1 J29.1 L20.2
NetC183_1: C183.1 C184.1 J29.10 J29.11 R119.1
NetC187_1: C187.1 J30.1 L21.2
NetC188_1: C188.1 J11.10 R121.1 SW10.2 U13.37
NetC191_1: C191.1 C192.1 J30.10 J30.11 R122.1
NetC219_2: C219.2 C220.2 C221.2 C222.2 L23.2 U13.9
NetC253_2: C253.2 R129.2
NetD6_1: D6.1 R139.2
NetD8_1: D8.1 R162.2
NetD9_2: D9.2 R48.1
NetD10_2: D10.2 R52.2
NetD11_1: D11.1 J12.3 R55.2
NetD11_2: D11.2 R54.1
NetD12_2: D12.2 R57.2
NetD13_1: D13.1 J15.3 R59.2
NetD13_2: D13.2 R58.1
NetD14_2: D14.2 R61.2
NetD15_1: D15.1 J16.3 R65.2
NetD15_2: D15.2 R64.1
NetD16_2: D16.2 R67.2
NetD17_1: D17.1 J17.3 R70.2
NetD17_2: D17.2 R68.1
NetD18_2: D18.2 R73.2
NetD19_1: D19.1 J18.3 R75.2
NetD19_2: D19.2 R74.1
NetD20_2: D20.2 R79.2
NetD21_1: D21.1 J19.3 R81.2
NetD21_2: D21.2 R80.1
NetD22_2: D22.2 R84.2
NetD23_1: D23.1 J20.3 R88.2
NetD23_2: D23.2 R87.1
NetD24_2: D24.2 R90.2
NetD25_1: D25.1 J21.3 R92.2
NetD25_2: D25.2 R91.1
NetD26_2: D26.2 R94.1
NetD27_2: D27.2 R98.2
NetD28_1: D28.1 J22.3 R102.2
NetD28_2: D28.2 R100.1
NetD29_2: D29.2 R104.1
NetD31_1: D31.1 R185.2
NetD33_1: D33.1 R208.2
NetDPR10_2: DPR10.2 R106.1
NetDPR11_2: DPR11.2 U13.23
NetJ9_2: J9.2 R47.2
NetJ10_2: J10.2 R49.2
NetJ11_4: J11.4 R116.2 U13.27
NetJ12_1: J12.1 R50.2 R52.1
NetJ13_2: J13.2 R51.2
NetJ14_2: J14.2 R53.2
NetJ15_1: J15.1 R56.2 R57.1
NetJ16_1: J16.1 R60.2 R61.1
NetJ17_1: J17.1 R66.2 R67.1
NetJ18_1: J18.1 R72.2 R73.1
NetJ19_1: J19.1 R78.2 R79.1
NetJ20_1: J20.1 R83.2 R84.1
NetJ21_1: J21.1 R89.2 R90.1
NetJ22_1: J22.1 R97.2 R98.1
NetJ23_2: J23.2 U13.26
NetJ31_2: J31.2 R123.2
NetJ32_2: J32.2 R124.2
NetL24_1: L24.1 U22.7 U22.8
NetL25_1: L25.1 U23.5
NetP2_1: P2.1 R3.1
NetP2_2: P2.2 U1.G4
NetP4_1: P4.1 R14.1
NetP4_2: P4.2 U4.G4
NetP6_1: P6.1 R25.1
NetP6_2: P6.2 U7.G4
NetP8_1: P8.1 R36.1
NetP8_2: P8.2 U10.G4
NetQ5_D: Q5.D U26.3 U27.3 U28.3 U29.3 U30.3 U31.3
NetQ6_D: Q6.D U32.3 U33.3 U34.3 U35.3 U36.3 U37.3
NetQ7_D: Q7.D U40.3 U41.3 U42.3 U43.3 U44.3 U45.3
NetQ8_D: Q8.D U46.3 U47.3 U48.3 U49.3 U50.3 U51.3
NetQ9_1: Q9.1 R77.2
NetQ9_3: Q9.3 R71.1
NetQ10_1: Q10.1 R82.2
NetQ10_3: Q10.3 R76.1
NetQ11_1: Q11.1 R99.2
NetQ11_3: Q11.3 R95.1
NetQ12_1: Q12.1 R103.2
NetQ12_3: Q12.3 R101.1
NetQ13_D: Q13.D U54.3 U55.3 U56.3 U57.3 U58.3 U59.3
NetQ14_D: Q14.D U60.3 U61.3 U62.3 U63.3 U64.3 U65.3
NetQ15_D: Q15.D U68.3 U69.3 U70.3 U71.3 U72.3 U73.3
NetQ16_D: Q16.D U74.3 U75.3 U76.3 U77.3 U78.3 U79.3
NetR1_1: R1.1 V1.1
NetR4_1: R4.1 U1.H4
NetR10_1: R10.1 U1.C8
NetR11_1: R11.1 U1.B3
NetR12_1: R12.1 V2.1
NetR15_1: R15.1 U4.H4
NetR21_1: R21.1 U4.C8
NetR22_1: R22.1 U4.B3
NetR23_1: R23.1 V3.1
NetR26_1: R26.1 U7.H4
NetR32_1: R32.1 U7.C8
NetR33_1: R33.1 U7.B3
NetR34_1: R34.1 V4.1
NetR37_1: R37.1 U10.H4
NetR43_1: R43.1 U10.C8
NetR44_1: R44.1 U10.B3
NetR62_2: R62.2 TP11.1 U13.42 U14.10
NetR63_2: R63.2 TP10.1 U13.1 U14.6
NetR69_2: R69.2 U14.7
NetR85_2: R85.2 TP16.1 U13.65 U15.10
NetR86_2: R86.2 TP15.1 U13.36 U15.6
NetR93_2: R93.2 U15.7
NetR106_2: R106.2 R107.1 U13.22
NetR115_2: R115.2 U19.1
NetR117_1: R117.1 SUSP10.2
NetR125_1: R125.1 TP22.1 U20.4
NetR126_2: R126.2 U22.6
NetR127_2: R127.2 R128.1 U22.4
NetR129_1: R129.1 U22.5
NetR141_1: R141.1 U26.5 U26.6
NetR142_1: R142.1 U27.5 U27.6
NetR143_1: R143.1 U28.5 U28.6
NetR144_1: R144.1 U29.5 U29.6
NetR145_1: R145.1 U30.5 U30.6
NetR146_1: R146.1 U31.5 U31.6
NetR147_1: R147.1 U32.5 U32.6
NetR148_1: R148.1 U33.5 U33.6
NetR149_1: R149.1 U34.5 U34.6
NetR150_1: R150.1 U35.5 U35.6
NetR151_1: R151.1 U36.5 U36.6
NetR152_1: R152.1 U37.5 U37.6
NetR164_1: R164.1 U40.5 U40.6
NetR165_1: R165.1 U41.5 U41.6
NetR166_1: R166.1 U42.5 U42.6
NetR167_1: R167.1 U43.5 U43.6
NetR168_1: R168.1 U44.5 U44.6
NetR169_1: R169.1 U45.5 U45.6
NetR170_1: R170.1 U46.5 U46.6
NetR171_1: R171.1 U47.5 U47.6
NetR172_1: R172.1 U48.5 U48.6
NetR173_1: R173.1 U49.5 U49.6
NetR174_1: R174.1 U50.5 U50.6
NetR175_1: R175.1 U51.5 U51.6
NetR187_1: R187.1 U54.5 U54.6
NetR188_1: R188.1 U55.5 U55.6
NetR189_1: R189.1 U56.5 U56.6
NetR190_1: R190.1 U57.5 U57.6
NetR191_1: R191.1 U58.5 U58.6
NetR192_1: R192.1 U59.5 U59.6
NetR193_1: R193.1 U60.5 U60.6
NetR194_1: R194.1 U61.5 U61.6
NetR195_1: R195.1 U62.5 U62.6
NetR196_1: R196.1 U63.5 U63.6
NetR197_1: R197.1 U64.5 U64.6
NetR198_1: R198.1 U65.5 U65.6
NetR210_1: R210.1 U68.5 U68.6
NetR211_1: R211.1 U69.5 U69.6
NetR212_1: R212.1 U70.5 U70.6
NetR213_1: R213.1 U71.5 U71.6
NetR214_1: R214.1 U72.5 U72.6
NetR215_1: R215.1 U73.5 U73.6
NetR216_1: R216.1 U74.5 U74.6
NetR217_1: R217.1 U75.5 U75.6
NetR218_1: R218.1 U76.5 U76.6
NetR219_1: R219.1 U77.5 U77.6
NetR220_1: R220.1 U78.5 U78.6
NetR221_1: R221.1 U79.5 U79.6
NON_REM0: J15.2 U13.5
NON_REM1: J16.2 U13.6
OSC_IN: U24.7 Y5.3
OSC_OUT: U24.8 Y5.1
OTG_ID: R9.1 U1.C9
OUT1: P12.2 U32.1 U33.1 U34.1 U35.1 U36.1 U37.1
OUT2: P12.3 U26.1 U27.1 U28.1 U29.1 U30.1 U31.1
PCK_IO: P1.20 RS3.5
PIN_STRAP_EN: J22.2 U13.63
PORT_DIS0: J12.2 U13.3
PORT_DIS1: J21.2 U13.4
PWR_EN_SEL: D26.1 R96.2 U13.84
PWR_SW_POL: R120.1 U13.31
RESET: C256.2 JP5.1 K5.2 R130.2 U24.29
RREF_SS: R112.1 U13.32
RREF_USB2: R113.1 U13.7
RX/B: D5.1 P11.3 P13.3 R137.2 R138.2 U25.7
RXI: P10.4 U24.30 U25.1
RXVDDQ: C39.2 C40.1 C79.2 C80.1 C119.2 C120.1 C159.2 C160.1 L3.2 L7.2 L11.2 L15.2 U1.A2 U4.A2 U7.A2 U10.A2
SCK: JP5.5 R139.1 U24.17
SST_N: C28.2 U1.A6
SST_P: C25.2 U1.A5
STB_IO: P1.2
SUSPEND: SUSP10.1 U13.25
SWD_IO: J11.2 J23.1 R46.2
TIGG_IO: P1.3 R2.1
TX/A: D5.2 P11.2 P13.2 R136.2 R137.1 U25.6
TXO: P10.3 U24.31 U25.4
TXVDDQ: C26.2 C27.1 C66.2 C68.1 C107.2 C108.1 C145.2 C147.1 L4.2 L8.2 L12.2 L16.2 U1.B5 U4.B5 U7.B5 U10.B5
US_OVRCURR: R118.2 TP20.1 U13.39
US_TXM: C166.1 U13.10
US_TXP: C167.1 U13.11
USB_DS1_DM: U1.A10
USB_DS1_DP: U1.A9
USB_DS1_RXM: U1.A4
USB_DS1_RXP: U1.A3
USB_DS1_TXM: C28.1
USB_DS1_TXP: C25.1
USB_DS2_DM: U4.A10
USB_DS2_DP: U4.A9
USB_DS2_RXM: U4.A4
USB_DS2_RXP: U4.A3
USB_DS2_TXM: C67.1
USB_DS2_TXP: C63.1
USB_DS3_DM: U7.A10
USB_DS3_DP: U7.A9
USB_DS3_RXM: U7.A4
USB_DS3_RXP: U7.A3
USB_DS3_TXM: C106.1
USB_DS3_TXP: C101.1
USB_DS4_DM: U10.A10
USB_DS4_DP: U10.A9
USB_DS4_RXM: U10.A4
USB_DS4_RXP: U10.A3
USB_DS4_TXM: C148.1
USB_DS4_TXP: C146.1
USB_US_DM: J26.2 U13.72 U16.2
USB_US_DP: J26.3 U13.71 U16.1
USB_US_RXM: J26.8 U13.13 U18.2
USB_US_RXP: J26.9 U13.14 U18.1
USB_US_TXM: C166.2 J26.5 U17.2
USB_US_TXP: C167.2 J26.6 U17.1
UTIGGER: P9.1 R135.2 S5.5 S5.6
V1P2: C9.1 C10.1 C11.1 C12.1 C21.1 C22.1 C23.1 C24.1 C38.2 C49.1 C50.1 C51.1 C52.1 C61.1 C62.1 C64.1 C65.1 C78.2 C89.1 C90.1 C91.1 C92.1 C102.1 C103.1 C104.1 C105.1 C118.2 C129.1 C130.1 C131.1 C132.1 C141.1 C142.1 C143.1 C144.1 C158.2 C203.2 C204.2 C205.2 C206.2 C207.2 C208.2 C209.2 C210.2 C211.2 C212.2 C213.2 C214.2 C215.2 C223.2 C224.2 C225.2 C226.2 C227.2 C228.2 C229.2 C230.2 C231.2 C232.2 C233.2 C234.2 C235.2 C236.2 C237.2 C238.2 C255.1 L2.1 L3.1 L4.1 L6.1 L7.1 L8.1 L10.1 L11.1 L12.1 L14.1 L15.1 L16.1 L22.1 L25.2 U1.B10 U1.C3 U1.E9 U1.F11 U1.H1 U1.J11 U1.L5 U1.L7 U4.B10 U4.C3 U4.E9 U4.F11 U4.H1 U4.J11 U4.L5 U4.L7 U7.B10 U7.C3 U7.E9 U7.F11 U7.H1 U7.J11 U7.L5 U7.L7 U10.B10 U10.C3 U10.E9 U10.F11 U10.H1 U10.J11 U10.L5 U10.L7 U13.12 U13.15 U13.18 U13.21 U13.44 U13.47 U13.53 U13.56 U13.59 U13.62 U13.67 U23.4
VBUS_DS1: L17.1 R71.2 U14.9
VBUS_DS2: L19.1 R76.2 U14.8
VBUS_DS3: L20.1 R95.2 U15.9
VBUS_DS4: L21.1 R101.2 U15.8
VBUS_IN: C247.1 J24.1 L18.1 R125.2 TP17.1 U20.1
VBUS_PROTECT: C248.1 DPR10.1 TP21.1 U20.5
VCC(+3.3V): C3.1 C7.2 C15.1 C16.1 C17.1 C18.1 C19.1 C20.1 C29.1 C30.1 C31.1 C32.1 C33.1 C34.1 C35.1 C36.1 C37.1 C43.1 C47.2 C55.1 C56.1 C57.1 C58.1 C59.1 C60.1 C69.1 C70.1 C71.1 C72.1 C73.1 C74.1 C75.1 C76.1 C77.1 C83.1 C87.2 C95.1 C96.1 C97.1 C98.1 C99.1 C100.1 C109.1 C110.1 C111.1 C112.1 C113.1 C114.1 C115.1 C116.1 C117.1 C123.1 C127.2 C135.1 C136.1 C137.1 C138.1 C139.1 C140.1 C149.1 C150.1 C151.1 C152.1 C153.1 C154.1 C155.1 C156.1 C157.1 C161.1 C179.2 C216.2 C217.2 C218.2 C239.2 C240.2 C241.2 C242.2 C243.2 C244.2 C245.2 C246.2 C252.1 C254.1 D10.1 D12.1 D14.1 D16.1 D18.1 D20.1 D22.1 D24.1 D27.1 G1.4 G2.4 G3.4 G4.4 J9.1 J10.1 J11.1 J13.1 J14.1 J27.1 J31.1 J32.1 L1.2 L5.2 L9.2 L13.2 L23.1 L24.2 P1.27 P1.28 P1.29 P1.30 P3.27 P3.28 P3.29 P3.30 P5.27 P5.28 P5.29 P5.30 P7.27 P7.28 P7.29 P7.30 R1.2 R3.2 R4.2 R5.1 R6.1 R7.2 R8.2 R12.2 R14.2 R15.2 R16.1 R17.1 R18.2 R19.2 R23.2 R25.2 R26.2 R27.1 R28.1 R29.2 R30.2 R34.2 R36.2 R37.2 R38.1 R39.1 R40.2 R41.2 R46.1 R50.1 R56.1 R60.1 R62.1 R63.1 R66.1 R72.1 R78.1 R83.1 R85.1 R86.1 R89.1 R97.1 R110.2 R111.2 R115.1 R116.1 R118.1 R121.2 R127.1 TVS9.1 U1.B1 U1.C11 U1.E3 U1.E10 U1.F1 U1.H11 U1.L9 U2.8 U3.8 U4.B1 U4.C11 U4.E3 U4.E10 U4.F1 U4.H11 U4.L9 U5.8 U6.8 U7.B1 U7.C11 U7.E3 U7.E10 U7.F1 U7.H11 U7.L9 U8.8 U9.8 U10.B1 U10.C11 U10.E3 U10.E10 U10.F1 U10.H11 U10.L9 U11.8 U12.8 U13.34 U13.66 U13.70 U13.75 U13.80 U13.88 U19.8 U23.1 U23.3
VCC(+5V): C8.1 C48.1 C88.1 C128.1 C162.1 C163.1 C249.2 C250.1 C251.1 C258.1 C259.2 C262.1 C263.2 C266.1 C267.2 C270.1 C271.2 DPR10.3 DPR11.1 J24.2 JP5.2 JP6.2 JP7.2 JP8.2 P10.2 P15.2 P20.2 P25.2 R126.1 R130.1 R131.1 R132.1 R133.1 R134.1 R136.1 R140.2 R153.1 R154.1 R155.1 R156.1 R157.1 R159.1 R163.2 R176.1 R177.1 R178.1 R179.1 R180.1 R182.1 R186.2 R199.1 R200.1 R201.1 R202.1 R203.1 R205.1 R209.2 U1.E11 U4.E11 U7.E11 U10.E11 U14.2 U14.3 U15.2 U15.3 U21.2 U22.2 U24.4 U24.6 U24.18 U25.8 U38.4 U38.6 U38.18 U39.8 U52.4 U52.6 U52.18 U53.8 U66.4 U66.6 U66.18 U67.8
VCC_9V: P11.8 P12.1 P13.8 P16.8 P17.1 P18.8 P21.8 P22.1 P23.8 P26.8 P27.1 P28.8 U21.3 U26.2 U27.2 U28.2 U29.2 U30.2 U31.2 U32.2 U33.2 U34.2 U35.2 U36.2 U37.2 U40.2 U41.2 U42.2 U43.2 U44.2 U45.2 U46.2 U47.2 U48.2 U49.2 U50.2 U51.2 U54.2 U55.2 U56.2 U57.2 U58.2 U59.2 U60.2 U61.2 U62.2 U63.2 U64.2 U65.2 U68.2 U69.2 U70.2 U71.2 U72.2 U73.2 U74.2 U75.2 U76.2 U77.2 U78.2 U79.2
VID_SEL0: J17.2 U13.43
VID_SEL1: J18.2 U13.64
VID_SEL2: J19.2 U13.85
XCK_IO: P1.19
XTAL_IN: C2.2 U1.C6 Y1.1
XTAL_OUT: C1.2 U1.C7 Y1.2
XTALIN: C186.2 U13.69 Y10.3
XTALOUT: C185.2 U13.68 Y10.1
pads on no net: C1_1.1 C1_1.2 C2_1.1 C2_1.2 C3_1.1 C3_1.2 C9_1.1 C9_1.2 C10_1.1 C10_1.2 C15_1.1 C15_1.2 C16_1.1 C16_1.2 C17_1.1 C17_1.2 C18_1.1 C18_1.2 C19_1.1 C19_1.2 C20_1.1 C20_1.2 C21_1.1 C21_1.2 C22_1.1 C22_1.2 C23_1.1 C23_1.2 C24_1.1 C24_1.2 C25_1.1 C25_1.2 C26_1.1 C26_1.2 C27_1.1 C27_1.2 C28_1.1 C28_1.2 C29_1.1 C29_1.2 C30_1.1 C30_1.2 C31_1.1 C31_1.2 C32_1.1 C32_1.2 C36_1.1 C36_1.2 C37_1.1 C37_1.2 C38_1.1 C38_1.2 C39_1.1 C39_1.2 C40_1.1 C40_1.2 C41.2 C41_1.1 C41_1.2 C42.2 C42_1.1 C42_1.2 C43_1.1 C43_1.2 C44.2 C44_1.1 C44_1.2 C45_1.1 C45_1.2 C46_1.1 C46_1.2 C47_1.1 C47_1.2 C63.2 C67.2 C81.2 C82.2 C84.2 C101.2 C106.2 C121.2 C122.2 C124.2 C146.2 C148.2 C168.1 C169.1 C175.1 C176.1 C181.1 C182.1 C189.1 C190.1 C260.1 C260.2 C261.2 C264.1 C264.2 C265.2 C268.1 C268.2 C269.2 D7.1 D7.2 D30.1 D30.2 D32.1 D32.2 G1.1 G1_1.1 G1_1.2 G1_1.3 G1_1.4 G2.1 G2.3 G3.1 G3.3 G4.1 G4.3 J11.6 J11.8 J25.2 J25.3 J25.5 J25.6 J25.8 J25.9 J28.2 J28.3 J28.5 J28.6 J28.8 J28.9 J29.2 J29.3 J29.5 J29.6 J29.8 J29.9 J30.2 J30.3 J30.5 J30.6 J30.8 J30.9 JP6.1 JP6.3 JP6.4 JP6.5 JP7.1 JP7.3 JP7.4 JP7.5 JP8.1 JP8.3 JP8.4 JP8.5 K6.2 K7.2 K8.2 L1_1.1 L1_1.2 L3_1.1 L3_1.2 L4_1.1 L4_1.2 L5_1.1 L5_1.2 P1.31 P3.2 P3.3 P3.4 P3.5 P3.6 P3.7 P3.8 P3.9 P3.10 P3.11 P3.12 P3.14 P3.15 P3.16 P3.17 P3.18 P3.19 P3.20 P3.21 P3.22 P3.23 P3.26 P3.31 P3_1.1 P3_1.2 P3_1.3 P3_1.4 P3_1.5 P3_1.6 P3_1.7 P3_1.8 P3_1.9 P3_1.10 P3_1.11 P3_1.12 P3_1.13 P3_1.14 P3_1.15 P3_1.16 P3_1.17 P3_1.18 P3_1.19 P3_1.20 P3_1.21 P3_1.22 P3_1.23 P3_1.24 P3_1.25 P3_1.26 P3_1.27 P3_1.28 P3_1.29 P3_1.30 P3_1.31 P5.2 P5.3 P5.4 P5.5 P5.6 P5.7 P5.8 P5.9 P5.10 P5.11 P5.12 P5.14 P5.15 P5.16 P5.17 P5.18 P5.19 P5.20 P5.21 P5.22 P5.23 P5.26 P5.31 P7.2 P7.3 P7.4 P7.5 P7.6 P7.7 P7.8 P7.9 P7.10 P7.11 P7.12 P7.14 P7.15 P7.16 P7.17 P7.18 P7.19 P7.20 P7.21 P7.22 P7.23 P7.26 P7.31 P11.9 P12.7 P13.9 P14.1 P15.1 P15.3 P15.4 P16.2 P16.3 P16.5 P16.6 P16.9 P17.2 P17.3 P17.7 P18.2 P18.3 P18.5 P18.6 P18.9 P19.1 P20.1 P20.3 P20.4 P21.2 P21.3 P21.5 P21.6 P21.9 P22.2 P22.3 P22.7 P23.2 P23.3 P23.5 P23.6 P23.9 P24.1 P25.1 P25.3 P25.4 P26.2 P26.3 P26.5 P26.6 P26.9 P27.2 P27.3 P27.7 P28.2 P28.3 P28.5 P28.6 P28.9 Q7.G Q8.G Q13.G Q14.G Q15.G Q16.G R11_1.1 R11_1.2 R13.1 R13.2 R16.2 R17.2 R18.1 R19.1 R20.1 R24.1 R24.2 R27.2 R28.2 R29.1 R30.1 R31.1 R35.1 R35.2 R38.2 R39.2 R40.1 R41.1 R42.1 R153.2 R154.2 R155.2 R156.2 R157.2 R158.2 R159.2 R160.1 R160.2 R161.2 R162.1 R163.1 R176.2 R177.2 R178.2 R179.2 R180.2 R181.2 R182.2 R183.1 R183.2 R184.2 R185.1 R186.1 R199.2 R200.2 R201.2 R202.2 R203.2 R204.2 R205.2 R206.1 R206.2 R207.2 R208.1 R209.1 RS1_1.1 RS1_1.2 RS1_1.3 RS1_1.4 RS1_1.5 RS1_1.6 RS1_1.7 RS1_1.8 RS2_1.1 RS2_1.2 RS2_1.3 RS2_1.4 RS2_1.5 RS2_1.6 RS2_1.7 RS2_1.8 RS3.3 RS3.6 RS3_1.1 RS3_1.2 RS3_1.3 RS3_1.4 RS3_1.5 RS3_1.6 RS3_1.7 RS3_1.8 RS4.1 RS4.2 RS4.3 RS4.4 RS4.5 RS4.6 RS4.7 RS4.8 RS5.1 RS5.2 RS5.3 RS5.4 RS5.5 RS5.6 RS5.7 RS5.8 RS6.1 RS6.2 RS6.3 RS6.4 RS6.5 RS6.6 RS6.7 RS6.8 RS7.1 RS7.2 RS7.3 RS7.4 RS7.5 RS7.6 RS7.7 RS7.8 RS8.1 RS8.2 RS8.3 RS8.4 RS8.5 RS8.6 RS8.7 RS8.8 RS9.1 RS9.2 RS9.3 RS9.4 RS9.5 RS9.6 RS9.7 RS9.8 RS10.1 RS10.2 RS10.3 RS10.4 RS10.5 RS10.6 RS10.7 RS10.8 RS11.1 RS11.2 RS11.3 RS11.4 RS11.5 RS11.6 RS11.7 RS11.8 RS12.1 RS12.2 RS12.3 RS12.4 RS12.5 RS12.6 RS12.7 RS12.8 S6.1 S6.2 S6.3 S6.4 S6.5 S6.6 S6.7 S6.8 S7.1 S7.2 S7.3 S7.4 S7.5 S7.6 S7.7 S7.8 S8.1 S8.2 S8.3 S8.4 S8.5 S8.6 S8.7 S8.8 U1.A11 U1.B11 U1.C4 U1.C10 U1.D1 U1.D2 U1.D3 U1.D7 U1.D11 U1.E1 U1.E4 U1.E5 U1.E7 U1.E8 U1.F2 U1.F3 U1.F4 U1.F5 U1.F6 U1.G2 U1.G3 U1.H2 U1.H3 U1.H6 U1.J1 U1.J2 U1.J3 U1.J4 U1.K1 U1.K2 U1.K5 U1.L4 U2.1 U2.2 U2.3 U2.7 U3.1 U3.2 U3.3 U3.7 U4.A5 U4.A6 U4.A11 U4.B11 U4.C1 U4.C2 U4.C4 U4.C5 U4.C6 U4.C7 U4.C9 U4.C10 U4.D1 U4.D2 U4.D3 U4.D4 U4.D5 U4.D6 U4.D7 U4.D9 U4.D10 U4.D11 U4.E1 U4.E4 U4.E5 U4.E7 U4.E8 U4.F2 U4.F3 U4.F4 U4.F5 U4.F6 U4.F7 U4.F8 U4.F9 U4.F10 U4.G2 U4.G3 U4.G5 U4.G6 U4.G7 U4.G8 U4.G9 U4.G10 U4.H2 U4.H3 U4.H5 U4.H6 U4.H7 U4.H8 U4.H9 U4.H10 U4.J1 U4.J2 U4.J3 U4.J4 U4.J5 U4.J6 U4.J7 U4.J8 U4.J9 U4.J10 U4.K1 U4.K2 U4.K5 U4.K6 U4.K7 U4.K8 U4.K9 U4.K10 U4.K11 U4.L4 U4.L8 U4.L10 U5.1 U5.2 U5.3 U5.5 U5.6 U5.7 U6.1 U6.2 U6.3 U6.5 U6.6 U6.7 U7.A5 U7.A6 U7.A11 U7.B11 U7.C1 U7.C2 U7.C4 U7.C5 U7.C6 U7.C7 U7.C9 U7.C10 U7.D1 U7.D2 U7.D3 U7.D4 U7.D5 U7.D6 U7.D7 U7.D9 U7.D10 U7.D11 U7.E1 U7.E4 U7.E5 U7.E7 U7.E8 U7.F2 U7.F3 U7.F4 U7.F5 U7.F6 U7.F7 U7.F8 U7.F9 U7.F10 U7.G2 U7.G3 U7.G5 U7.G6 U7.G7 U7.G8 U7.G9 U7.G10 U7.H2 U7.H3 U7.H5 U7.H6 U7.H7 U7.H8 U7.H9 U7.H10 U7.J1 U7.J2 U7.J3 U7.J4 U7.J5 U7.J6 U7.J7 U7.J8 U7.J9 U7.J10 U7.K1 U7.K2 U7.K5 U7.K6 U7.K7 U7.K8 U7.K9 U7.K10 U7.K11 U7.L4 U7.L8 U7.L10 U8.1 U8.2 U8.3 U8.5 U8.6 U8.7 U9.1 U9.2 U9.3 U9.5 U9.6 U9.7 U10.A5 U10.A6 U10.A11 U10.B11 U10.C1 U10.C2 U10.C4 U10.C5 U10.C6 U10.C7 U10.C9 U10.C10 U10.D1 U10.D2 U10.D3 U10.D4 U10.D5 U10.D6 U10.D7 U10.D9 U10.D10 U10.D11 U10.E1 U10.E4 U10.E5 U10.E7 U10.E8 U10.F2 U10.F3 U10.F4 U10.F5 U10.F6 U10.F7 U10.F8 U10.F9 U10.F10 U10.G2 U10.G3 U10.G5 U10.G6 U10.G7 U10.G8 U10.G9 U10.G10 U10.H2 U10.H3 U10.H5 U10.H6 U10.H7 U10.H8 U10.H9 U10.H10 U10.J1 U10.J2 U10.J3 U10.J4 U10.J5 U10.J6 U10.J7 U10.J8 U10.J9 U10.J10 U10.K1 U10.K2 U10.K5 U10.K6 U10.K7 U10.K8 U10.K9 U10.K10 U10.K11 U10.L4 U10.L8 U10.L10 U11.1 U11.2 U11.3 U11.5 U11.6 U11.7 U12.1 U12.2 U12.3 U12.5 U12.6 U12.7 U13. U13.19 U13.20 U13.45 U13.46 U13.54 U13.55 U13.60 U13.61 U13.73 U13.74 U13.76 U13.77 U13.78 U13.79 U13.81 U13.82 U14.12 U14.13 U14.14 U14.15 U14.16 U15.12 U15.13 U15.14 U15.15 U15.16 U38.1 U38.2 U38.7 U38.8 U38.9 U38.10 U38.11 U38.12 U38.13 U38.14 U38.15 U38.16 U38.17 U38.19 U38.20 U38.22 U38.23 U38.24 U38.25 U38.26 U38.27 U38.28 U38.29 U38.30 U38.31 U38.32 U39.1 U39.2 U39.3 U39.4 U39.6 U39.7 U40.1 U41.1 U42.1 U43.1 U44.1 U45.1 U46.1 U47.1 U48.1 U49.1 U50.1 U51.1 U52.1 U52.2 U52.7 U52.8 U52.9 U52.10 U52.11 U52.12 U52.13 U52.14 U52.15 U52.16 U52.17 U52.19 U52.20 U52.22 U52.23 U52.24 U52.25 U52.26 U52.27 U52.28 U52.29 U52.30 U52.31 U52.32 U53.1 U53.2 U53.3 U53.4 U53.6 U53.7 U54.1 U55.1 U56.1 U57.1 U58.1 U59.1 U60.1 U61.1 U62.1 U63.1 U64.1 U65.1 U66.1 U66.2 U66.7 U66.8 U66.9 U66.10 U66.11 U66.12 U66.13 U66.14 U66.15 U66.16 U66.17 U66.19 U66.20 U66.22 U66.23 U66.24 U66.25 U66.26 U66.27 U66.28 U66.29 U66.30 U66.31 U66.32 U67.1 U67.2 U67.3 U67.4 U67.6 U67.7 U68.1 U69.1 U70.1 U71.1 U72.1 U73.1 U74.1 U75.1 U76.1 U77.1 U78.1 U79.1 V2.2 V3.2 V4.2 Y1.3 Y1.4 Y1_1.1 Y1_1.2 Y1_1.3 Y1_1.4 Y2.1 Y2.2 Y2.3 Y2.4 Y3.1 Y3.2 Y3.3 Y3.4 Y4.1 Y4.2 Y4.3 Y4.4 Y6.1 Y6.3 Y7.1 Y7.3 Y8.1 Y8.3

## Keep-outs
Keep-Out Layer:
  the board outline again, w7.87

## Other copper
Top Layer:
  pour cut-out: -725.4,-549.4 -725.4,-459.99 -813.4,-459.99 -813.4,-549.4

## Silkscreen, mask and mechanical layers (free items; w line width, h text height)
Top Overlay:
  lines w7.87: -1574.8,0 1574.8,0 ; 0,-1574.8 0,1574.8
Mechanical 1:
  lines w7.87: -787.4,-787.4 0,-787.4 0,0